# Altium PCB SmartCanBus.PcbDoc
Units mm, origin at the board's own origin, x right, y up, seen from the top; angles counter-clockwise.
Board outline 41 x 16 mm, 2 copper layers (Top Layer, Bottom Layer); 19 components, 19 nets, 106 pads, 21 vias.
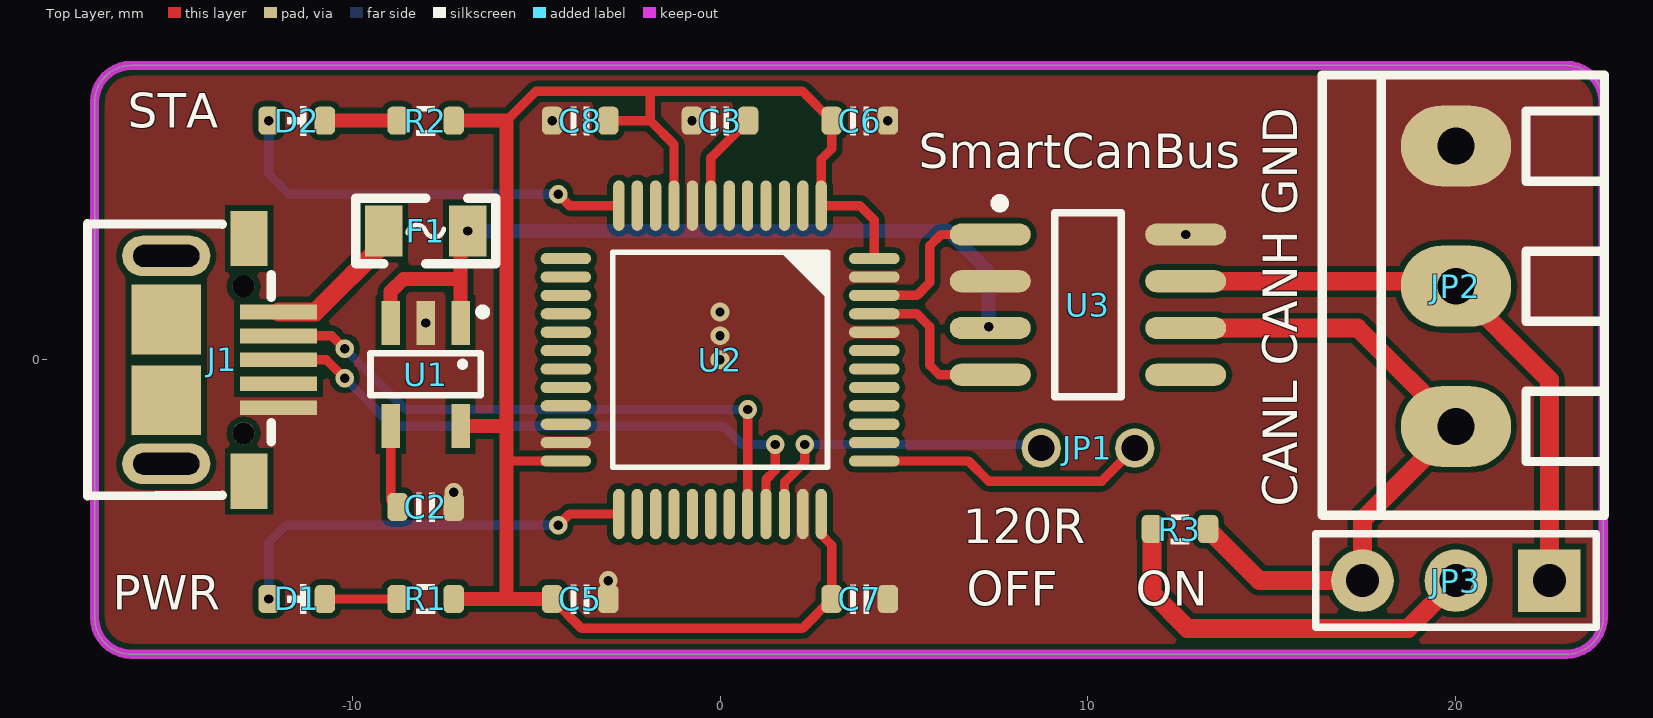
[diagram p0: Top Layer view]
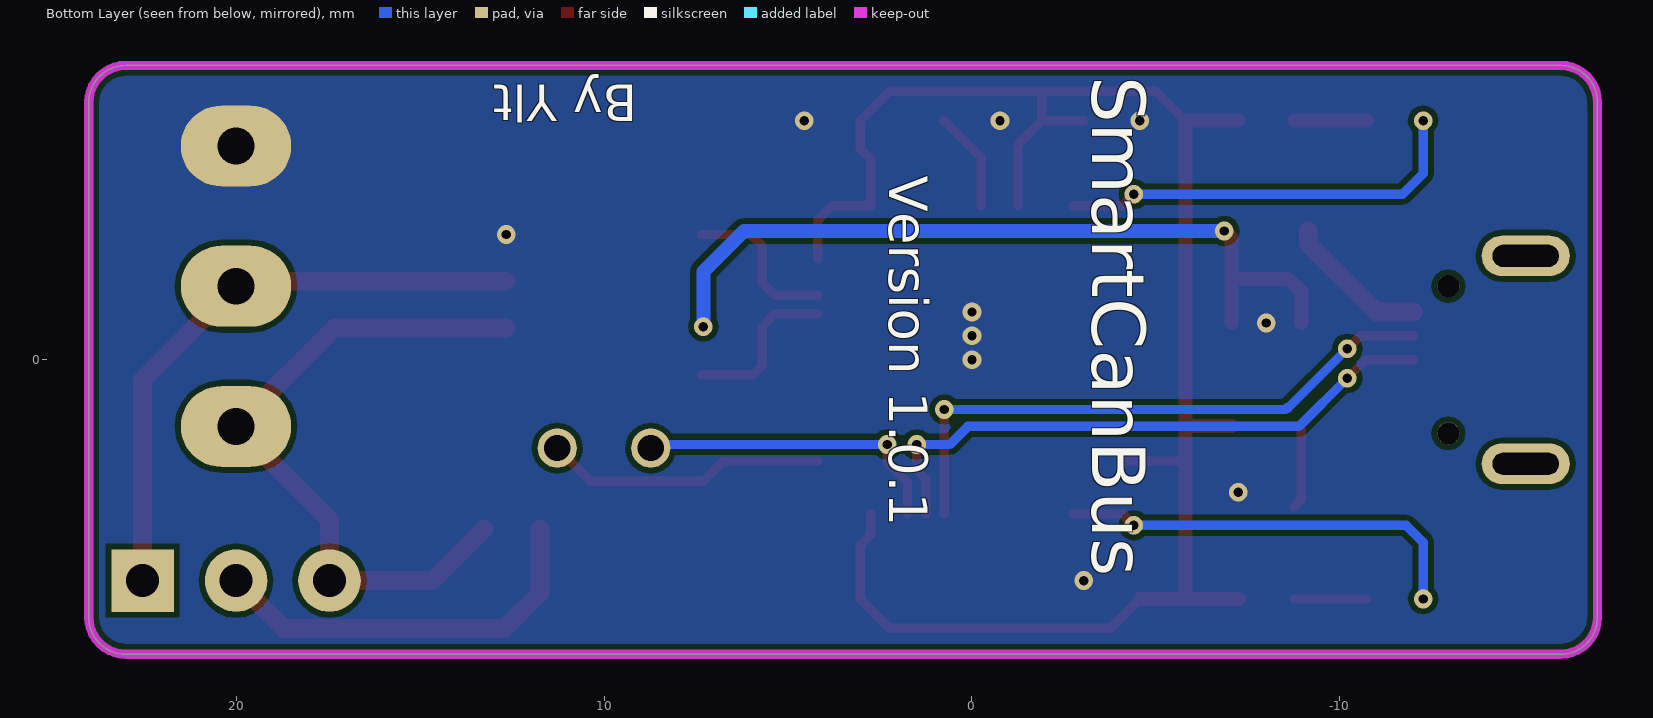
[diagram p1: Bottom Layer view, seen from below]

## Layer stack, top to bottom
Top Solder: solder mask 0.0102, Solder Resist, Dk 3.5
Top Layer: signal copper 0.0356
Dielectric 1: dielectric 0.32, FR-4, Dk 4.8
Bottom Layer: signal copper 0.0356
Bottom Solder: solder mask 0.0102, Solder Resist, Dk 3.5

## Board outline
-17,-7 ccw(c-16,-7) -16,-8 23,-8 ccw(c23,-7) 24,-7 24,7 ccw(c23,7) 23,8 -16,8 ccw(c-16,7) -17,7

## Design rules (kind name [scope] priority, off if disabled: settings)
Clearance [All] p1: gap=0.152 ignorepadtopadclearanceinfootprint=FALSE except(0: Arc-Hole Track-Hole SMDPad-Hole THPad-Hole Via-Hole Fill-Hole Poly-Hole Region-Hole Text-Hole; 0.254: Arc-Text Track-Text SMDPad-Text THPad-Text Via-Text Fill-Text Poly-Text Region-Text Text-Text)
HoleSize [All] p1: absolutevalues=TRUE maxlimit=25.4 minlimit=0.025 maxpercent=80.000 minpercent=20.000
HoleToHoleClearance [All] p1: gap=0.051 allowstackedmicrovias=TRUE
PlaneConnect [All] p1: planeconnectstyle=Direct reliefexpansion=0.508 reliefentries=4 reliefconductorwidth=0.254 reliefairgap=0.254
PolygonConnect [All] p1: connectstyle=Direct reliefconductorwidth=0.254 reliefentries=4 polygonreliefangle="90 Angle" airgapwidth=0.254
RoutingVias [All] p1: holewidth=0.254 width=0.508 viastyle="Through Hole" minholewidth=0.152 minwidth=0.152 maxholewidth=0.762 maxwidth=1.27
SilkToSilkClearance [All] p1 off: silktosilkclearance=0.254
SilkToSolderMaskClearance [IsPad] p1 off: minsilkscreentomaskgap=0.254 clearancetoexposedcopper=TRUE
SolderMaskExpansion [All] p1: expansion=0.102 istentingtop=FALSE
Width [All] p1: maxlimit=1.27 minlimit=0.254 preferedwidth=0.254 minimp=50.000000 maximp=50.000000 favimp=50.000000
25 further rules are at their usual default settings.

## Components (designator, comment, footprint, x,y, rotation, side; value= is the part's Value field where it differs from the comment)
C2 "0.1uF" 0603_CAP -8,-4 r180 top value=0.1u
C3 "0.1uF" 0603_CAP 0,6.5 r0 top value=0.1u
C5 "0.1uF" 0603_CAP -3.8,-6.5 r0 top value=0.1u
C6 "0.1uF" 0603_CAP 3.8,6.5 r0 top value=0.1u
C7 "0.1uF" 0603_CAP 3.8,-6.5 r0 top value=0.1u
C8 "0.1uF" 0603_CAP -3.8,6.5 r180 top value=0.1u
D1 "LED-0603" 0603_LED_RED -11.5,-6.5 r180 top
D2 "LED-0603" 0603_LED_BLUE -11.5,6.5 r180 top
F1 "6V 0.5A" "FU 0805" -8,3.5 r0 top
J1 "PowerJack_2.5" USB-MICRO-B-5P -12,0 r270 top
JP1 "下载口2P" 下载口2P 10,-2.4 r0 top
JP2 "HDR-1X3" KF128-3.81-3P 20,2 r90 top
JP3 "HDR-1X3" HDR2.54-LI-3P 20,-6 r180 top
R1 "1K" 0603_RES -8,-6.5 r180 top
R2 "1K" 0603_RES -8,6.5 r180 top
R3 "1K" 0603_RES 12.5,-4.6 r0 top value=120R
U1 "LP2992" SOT23-5N -8,-0.4 r180 top
U2 "STM32F072CBT6" LQFP-48 0,0 r270 top
U3 "TJA1050" "SOIC-8 - duplicate" 10,1.5 r0 top

## Footprints (in the part's own frame and the unit in brackets; to place one, negate y for a bottom-side part, rotate by r counter-clockwise, add the part's x,y. Pads: shape width x height; smd on the part's side, far side on the other; paste and mask are expansions set on the pad)
0603_CAP [mil]
  rrect50% 22x30 smd: 1(-30,0) 2(30,0)
  silkscreen extent -10,-15 10,15, body extent -31,-16 32,16, height 31
0603_LED_BLUE [mil]
  rrect50% 22x30 smd: 1(-30,0) 2(30,0)
  silkscreen extent -10,-16 10,16, body extent -32,-16 32,16, height 24
0603_LED_RED [mil]
  rrect50% 22x30 smd: 1(-30,0) 2(30,0)
  silkscreen extent -10,-16 10,16, body extent -31,-16 32,16, height 24
0603_RES [mil]
  rrect50% 22x30 smd: 1(-30,0) 2(30,0)
  silkscreen extent -10,-16 10,16, body extent -31,-16 31,16, height 18
"FU 0805" [mil] "贴片保险丝"
  rect 40x55 smd: 1(-45,0) 2(45,0)
  silkscreen extent -75,-35 75,35, body extent -39,-24 39,24, height 20
HDR2.54-LI-3P [mm] "排针，3脚"
  rect 1.7x1.7 hole 0.9: 1(-2.54,0)
  round 1.7 hole 0.9: 2(0,0) 3(2.54,0)
  silkscreen extent -3.81,-1.27 3.81,1.27, body extent -3.81,-1.27 3.81,1.27, height 8.5
KF128-3.81-3P [mm] "螺钉式接线端子，脚距3.81mm"
  oval 2.2x3 hole 1: 1(-3.81,0) 2(0,0) 3(3.81,0)
  silkscreen extent -6.22,-4.04 5.74,3.63, body extent -6.21,-3.9 5.72,3.5, height 8.55
LQFP-48 [mil]
  oval 54x12 smd: 1(-165,108.27) 2(-165,88.58) 3(-165,68.9) 4(-165,49.21) 5(-165,29.53) 6(-165,9.84) 7(-165,-9.84) 8(-165,-29.53) 9(-165,-49.21) 10(-165,-68.9) 11(-165,-88.58) 12(-165,-108.27) 25(165,-108.27) 26(165,-88.58) 27(165,-68.9) 28(165,-49.21) 29(165,-29.53) 30(165,-9.84) 31(165,9.84) 32(165,29.53) 33(165,49.21) 34(165,68.9) 35(165,88.58) 36(165,108.27)
  oval 12x54 smd: 13(-108.27,-165) 14(-88.58,-165) 15(-68.9,-165) 16(-49.21,-165) 17(-29.53,-165) 18(-9.84,-165) 19(9.84,-165) 20(29.53,-165) 21(49.21,-165) 22(68.9,-165) 23(88.58,-165) 24(108.27,-165) 37(108.27,165) 38(88.58,165) 39(68.9,165) 40(49.21,165) 41(29.53,165) 42(9.84,165) 43(-9.84,165) 44(-29.53,165) 45(-49.21,165) 46(-68.9,165) 47(-88.58,165) 48(-108.27,165)
  silkscreen extent -115,-115 115,115, body extent -177,-175 177,180, height 61
"SOIC-8 - duplicate" [mm]
  oval 2.2x0.6 smd: 1(-2.654,1.905) 2(-2.654,0.635) 3(-2.654,-0.635) 4(-2.654,-1.905) 5(2.654,-1.905) 6(2.654,-0.635) 7(2.654,0.635) 8(2.654,1.905)
  silkscreen extent -2.52,-2.5 0.9,2.88, body extent -3,-2.45 3,2.45, height 1.7
SOT23-5N [mm] "3x1.6x1.1mm(长宽高)  封装库来自淘宝卖家 ID：黄晶宝石"
  rect 0.5x1.2 smd: 1(-0.95,-1.4) 2(0,-1.4) 3(0.95,-1.4) 4(0.95,1.4) 5(-0.95,1.4)
  silkscreen extent -1.63,-1.78 1.5,0.56, body extent -1.5,-1.4 1.5,1.4, height 1.15
USB-MICRO-B-5P [mm]
  rect 0.4x2.1 smd: 1(-1.3,0) 2(-0.65,0) 3(0,0) 4(0.65,0) 5(1.3,0)
  rect 1.5x1 smd: 6(-3.3,-0.8) 6(3.3,-0.8)
  oval 1.1x2.399 hole 0.6 slot 1.8 at 90 deg: 6(-2.825,-3.05) 6(2.825,-3.05)
  rect 1.9x1.9 smd: 6(-1.1,-3.05) 6(1.1,-3.05)
  round 0.6 hole 0.6 unplated: ""(-2,-0.95) ""(2,-0.95)
  silkscreen extent -3.7,-5.19 3.7,-0.2, body extent -4,-5.9 4,-0.3, height 2.8
下载口2P [mil]
  round 42 hole 28: 1(-50,0) 2(50,0)

## Part data
C2 C3 C5 C6 C7 C8: library part 电容-0603, "电容"
D1: library part 二极管-0603-RED, "发光二极管"
D2: library part 二极管-0603-BLUE, "发光二极管"
F1: library part FU, "贴片保险丝"
J1: library part 接插件-USB-MICRO-B, "DC Power Jack"
JP1: library part 接插件-下载口2P, "下载口2P SWD"
JP2 JP3: library part "Header 3", "3P接插件"
  JP3: BOM名称=3P接, 学习资源=https://shop463601444.taobao., 版权归属=封装库来自淘
R1 R2 R3: library part 电阻-0603, "电阻"
U1: "电源芯片"
U2: "48MHZ Crotex-M0 32位单片机 LQFP-48_7x7x05P"
U3: "CAN芯片"

## Via types
v1: diameter 0.508, hole 0.254, Top Layer to Bottom Layer, tented both sides, 21 vias

## Nets (pads, with @x,y where several pads share a name; then routed paths per layer and width w, separated by ;. In a path a pad name is that pad's centre, name@x,y a point inside that pad or via, vN(x,y) a via of type N, cw(c..) or ccw(c..) an arc to the next point about the centre after c; other vN are vias at no path point)
3.3V: C5.1 C6.1 C7.1 C8.1 R1.1 R2.1 U1.5 U2.1 U2.9 U2.24 U2.36 U2.48 | length 49.8
  Top Layer w0.254: -5.8,6.5 -5,7.3 -1.9,7.3 ; -5.75,-2.75 U2.24 ; C5.1 -3.762,-7.3 2.238,-7.3 C7.1 3.038,-5.038 2.75,-4.75 U2.36 ; C8.1 -1.9,6.5 ; U2.9 -1.25,5.85 -1.9,6.5 ; U2.48 4.191,3.8 3.8,4.191 U2.1 2.75,5.45 3.038,5.738 C6.1 2.238,7.3 -1.9,7.3 ; -1.9,6.5 -1.9,7.3
  Top Layer w0.381: R1.1 -5.8,-6.5 ; R2.1 -5.8,6.5 -5.8,-1.8 ; U1.5 -5.8,-1.8 ; -5.75,-2.75 -5.8,-2.7 ; C5.1 -5.8,-6.5 ; -5.8,-6.5 -5.8,-2.7 ; -5.8,-2.7 -5.8,-1.8
5V: F1.2 U1.1 U1.3 U3.3 | length 21.6
  Top Layer w0.381: U1.3 -8.95,1.85 -8.6,2.2 -7.05,2.2 ; U1.1 -7.05,2.2 ; v1(-6.857,3.5) -7.05,3.307 -7.05,2.2
  Bottom Layer w0.381: v1(-6.857,3.5) 6.2,3.5 7.3,2.4 v1(7.3,0.9)
CAN_H: JP2.2 JP3.1 U3.7 | length 16.5
  Top Layer w0.508: U3.7 19.865,2.135 JP2.2 22.54,-0.54 JP3.1
CAN_L: JP2.1 JP3.3 R3.2 U3.6 | length 18.5
  Top Layer w0.508: U3.6 17.325,0.865 JP2.1 17.46,-4.35 JP3.3 14.662,-6 R3.2
CAN_RX: U2.45 U3.4 | length 4.5
  Top Layer w0.254: U2.45 5.35,1.25 5.7,0.9 5.7,-0.15 5.955,-0.405 U3.4
CAN_TX: U2.46 U3.1 | length 4.4
  Top Layer w0.254: U2.46 5.35,1.75 5.7,2.1 5.7,3.1 6.005,3.405 U3.1
GND: C2.1 C3.1 C5.2 C6.2 C7.2 C8.2 J1.5 JP2.3 U1.2 U2.8 U2.23 U2.35 U2.44 U2.47 U3.2 U3.8
  other v1: -3.038,-6 -7.238,-3.6 0,0 0,0.65 -8,1 0,1.3 12.654,3.405 -4.562,6.5 -0.762,6.5 4.562,6.5
LED1: D1.2 U2.25 | length 11.4
  Top Layer w0.254: v1(-4.4,-4.5) -4.091,-4.191 U2.25
  Bottom Layer w0.254: v1(-12.262,-6.5) -12.262,-4.962 -11.8,-4.5 v1(-4.4,-4.5)
LED2: D2.2 U2.12 | length 11.3
  Top Layer w0.254: v1(-4.4,4.5) -4.091,4.191 U2.12
  Bottom Layer w0.254: v1(-12.262,6.5) -12.262,5.062 -11.7,4.5 v1(-4.4,4.5)
NetC2_2: C2.2 U1.4 | length 2.3
  Top Layer w0.254: U1.4 -8.95,-3.812 C2.2
NetC3_2: C3.2 U2.7 | length 2.7
  Top Layer w0.254: U2.7 -0.25,5.488 C3.2
NetD1_1: D1.1 R1.2 | length 2
  Top Layer w0.254: D1.1 R1.2
NetD2_1: D2.1 R2.2 | length 2
  Top Layer w0.381: D2.1 R2.2
NetF1_1: F1.1 J1.1 | length 4
  Top Layer w0.508: J1.1 -11,1.3 -9.143,3.157 F1.1
NetJP3_2: JP3.2 R3.1 | length 10.9
  Top Layer w0.508: R3.1 11.738,-6.338 12.7,-7.3 18.7,-7.3 JP3.2
SWCLK: JP1.2 U2.37 | length 7.7
  Top Layer w0.254: U2.37 6.75,-2.75 7.3,-3.3 10.37,-3.3 JP1.2
SWDIO: JP1.1 U2.34 | length 8.6
  Top Layer w0.254: U2.34 1.75,-3.325 2.3,-2.775 v1(2.3,-2.3)
  Bottom Layer w0.254: v1(2.3,-2.3) 8.63,-2.3 JP1.1
USB_DM: J1.2 U2.32 | length 16.4
  Top Layer w0.254: J1.2 -10.55,0.65 v1(-10.2,0.3) ; U2.32 v1(0.75,-1.35)
  Bottom Layer w0.254: v1(-10.2,0.3) -8.582,-1.318 -8.564,-1.3 -8.514,-1.35 v1(0.75,-1.35)
USB_DP: J1.3 U2.33 | length 16.4
  Top Layer w0.254: J1.3 -10.7,0 v1(-10.2,-0.5) ; U2.33 1.25,-3.25 1.5,-3 v1(1.5,-2.3)
  Bottom Layer w0.254: v1(-10.2,-0.5) -8.89,-1.81 0.11,-1.81 0.6,-2.3 v1(1.5,-2.3)
pads on no net: J1. J1.4 J1.6 U2.2 U2.3 U2.4 U2.5 U2.6 U2.10 U2.11 U2.13 U2.14 U2.15 U2.16 U2.17 U2.18 U2.19 U2.20 U2.21 U2.22 U2.26 U2.27 U2.28 U2.29 U2.30 U2.31 U2.38 U2.39 U2.40 U2.41 U2.42 U2.43 U3.5

## Polygon pours and split planes (outlines as drawn)
GND on Top Layer "GND_L01_P000" (solid, remove dead copper, pour order 0): -17,9 25,9 25,-9 -17,-9
GND on Bottom Layer "GND_L02_P002" (solid, remove dead copper, pour order 2): -17,9 25,9 25,-9 -17,-9

## Keep-outs
Keep-Out Layer:
  the board outline again, w0.254

## Silkscreen, mask and mechanical layers (free items; w line width, h text height)
Top Overlay:
  text "STA" at -16.1,6 h1.6
  text "SmartCanBus" at 5.4,4.9 h1.6
  text "CANL CANH GND" at 16,-4 h1.6 r90
  text "120R" at 6.6,-5.3 h1.6
  text "OFF" at 6.7,-7 h1.6
  text "ON" at 11.3,-7 h1.6
  text "PWR" at -16.5,-7.1 h1.6
Bottom Overlay:
  text "By Ylt" at 9.1,7.8 h1.7 r180
  text "SmartCanBus" at -2.8,7.7 h2.5 r90
  text "Version 1.0.1" at 2.6,5 h1.8 r90